# Altium PCB PCB1.PcbDoc (part 3 of 3)
Units mm, origin at the board's own origin, x right, y up, seen from the top; angles counter-clockwise.
Board outline 395.86 x 234.82 mm, 2 copper layers (Top Layer, Bottom Layer); 284 components, 215 nets, 949 pads, 803 vias.
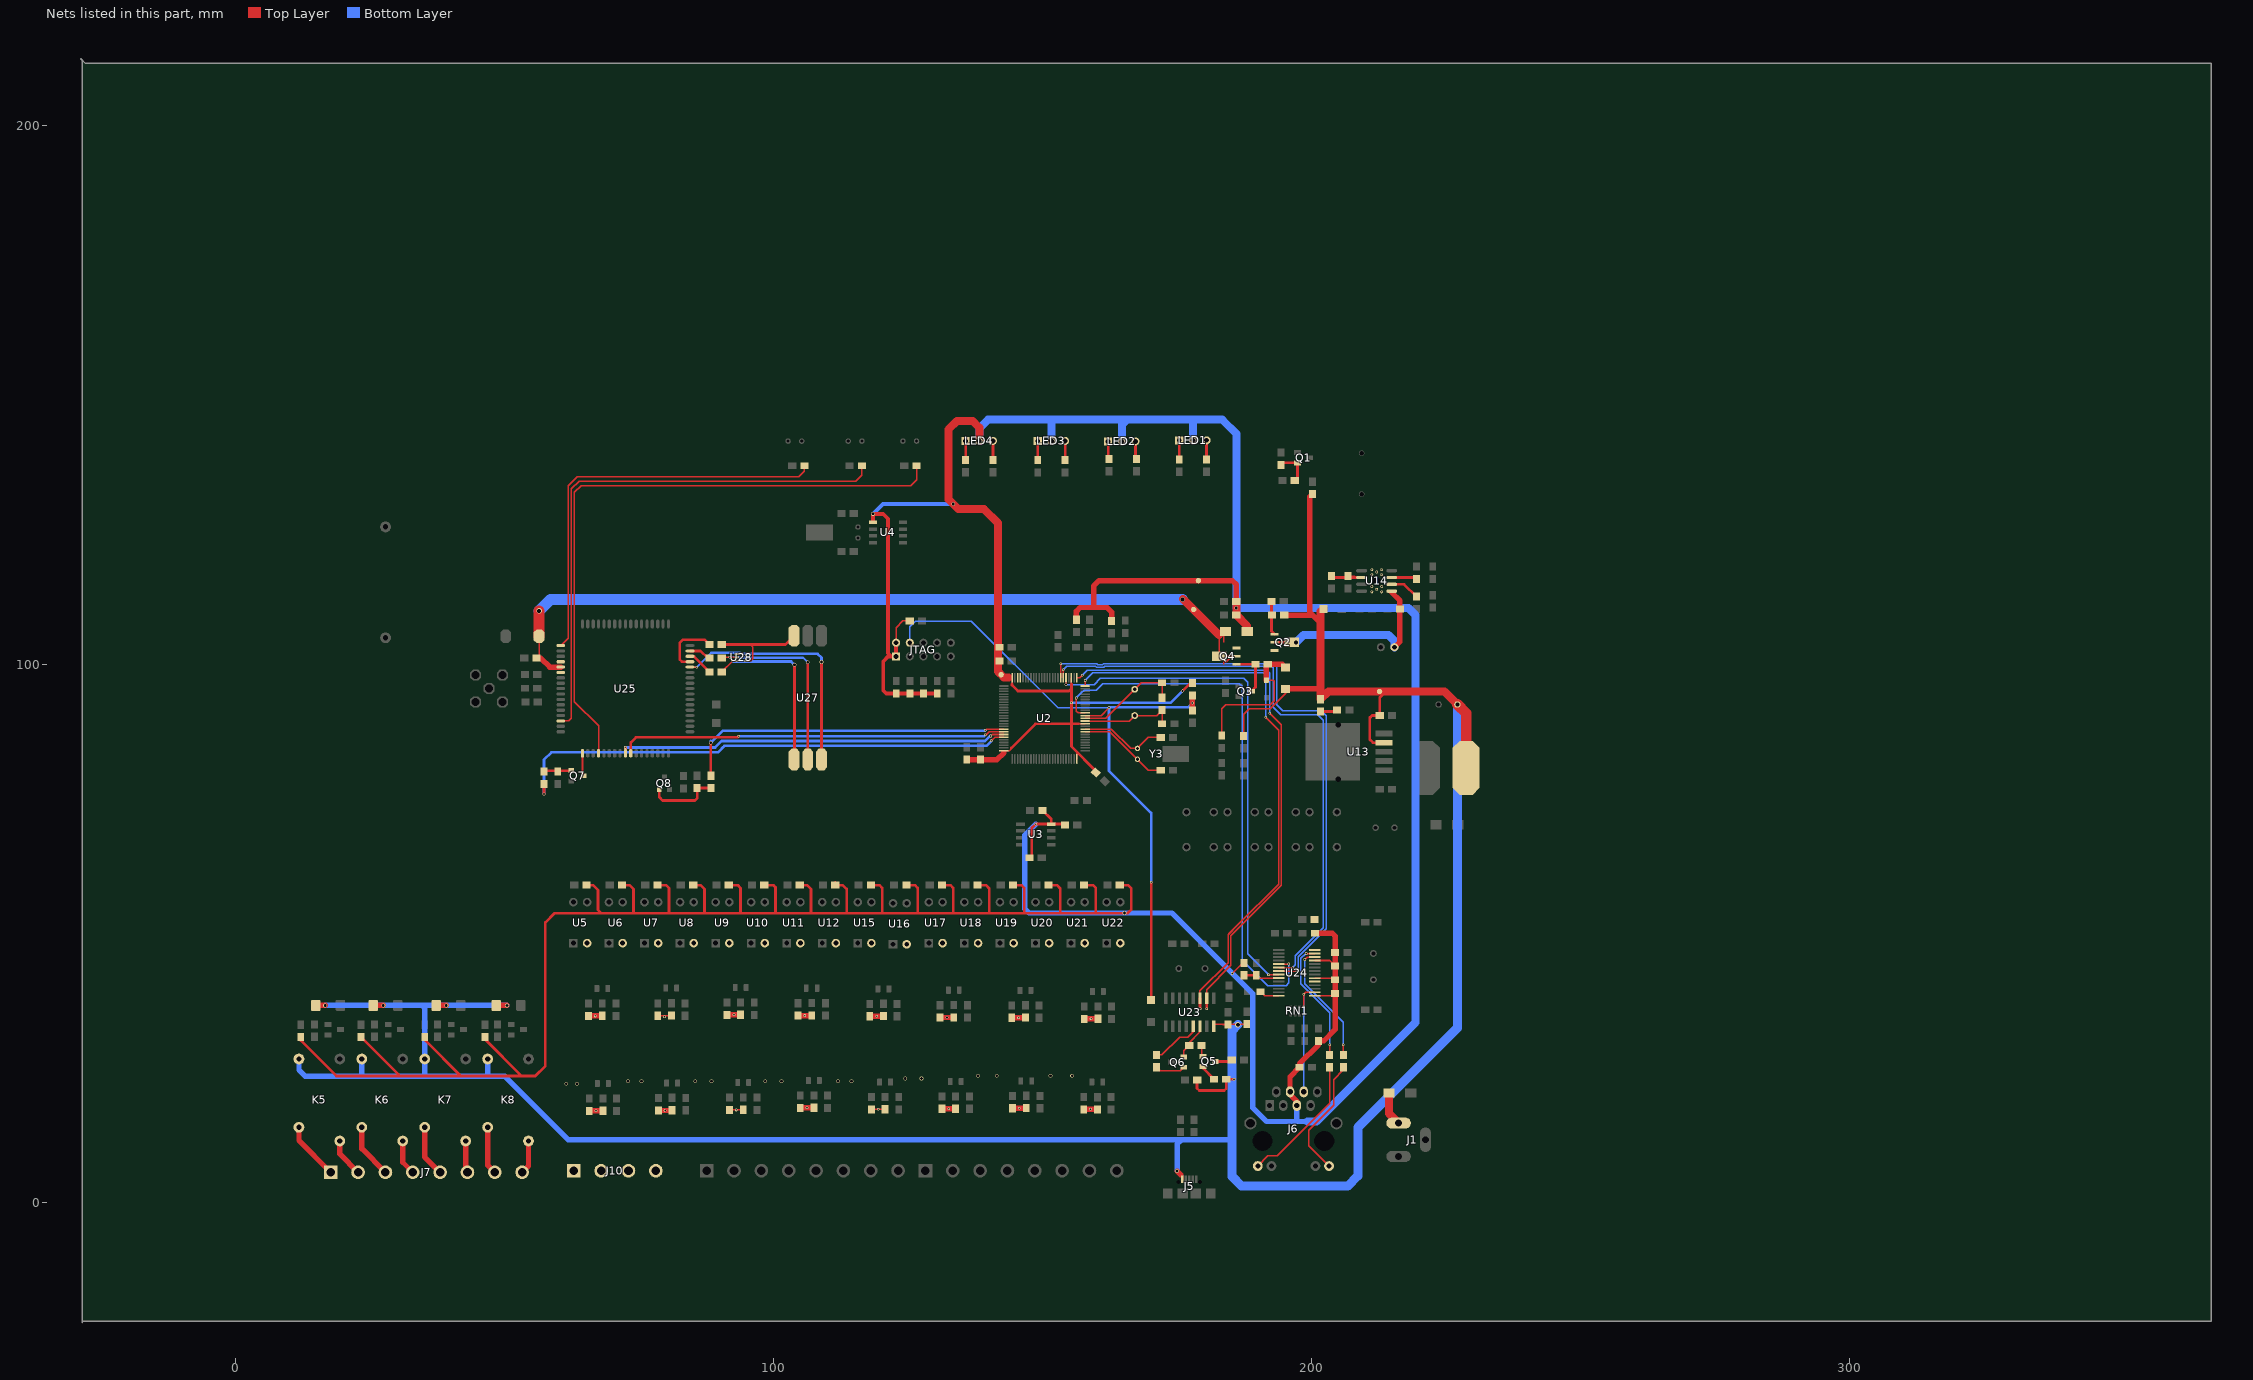
[diagram p3: the nets of this part, all layers, seen from the top]

## Via types
v1: diameter 0.5, hole 0.3, Top Layer to Bottom Layer, tented both sides, 771 vias
v2: diameter 0.7, hole 0.5, Top Layer to Bottom Layer, tented both sides, 29 vias
v3: diameter 1, hole 0.7, Top Layer to Bottom Layer, tented both sides, 3 vias

## Nets (pads, with @x,y where several pads share a name; then routed paths per layer and width w, separated by ;. In a path a pad name is that pad's centre, name@x,y a point inside that pad or via, vN(x,y) a via of type N, cw(c..) or ccw(c..) an arc to the next point about the centre after c; other vN are vias at no path point) (continued)
NetJ6_6: J6.6 RN1.8 U24.16 | length 40.9
  Top Layer w0.254: v1(198.526,38.638) v1@198.532,38.644 ; RN1.8@198.532,36.344 198.532,38.638 v1@198.532,38.644 ; U24.16@200.616,39.012 198.9,39.012 ; v1@198.532,38.644 198.9,39.012 ; v1@198.532,38.644 198.9,39.012
  Bottom Layer w0.254: J6.6@198.526,20.52 v1(198.526,38.638) ; 198.532,37.45 198.532,20.526 J6.6@199.1,21.094
NetJ6_9: J6.9 R106.1 | length 24.9
  Top Layer w0.254: J6.9@190.001,6.73 191.871,8.6 193.6,8.6 203.352,18.352 R106.1@203.352,25.092
NetJ6_12: J6.12 R107.1 | length 22.6
  Top Layer w0.254: J6.12@203.25,6.73 199.5,10.48 199.5,13.4 204.1,18 204.1,22.8 205.892,24.592 R107.1@205.892,25.092
NetJ7_1: J7.1 K5.1 | length 10.8
  Top Layer w1: K5.1@11.848,13.924 11.848,11.478 J7.1@17.756,5.57
NetJ7_2: J7.2 K5.2 | length 7.2
  Top Layer w1: K5.2@19.448,11.384 19.448,8.958 J7.2@22.836,5.57
NetJ7_3: J7.3 K6.1 | length 10.2
  Top Layer w1: K6.1@23.532,13.924 23.532,9.954 J7.3@27.916,5.57
NetJ7_4: J7.4 K6.2 | length 6.6
  Top Layer w1: K6.2@31.132,11.384 31.132,7.434 J7.4@32.996,5.57
NetJ7_5: J7.5 K7.1 | length 9.5
  Top Layer w1: K7.1@35.216,13.924 35.216,8.43 J7.5@38.076,5.57
NetJ7_6: J7.6 K7.2 | length 6
  Top Layer w1: K7.2@42.816,11.384 42.816,5.91 J7.6@43.156,5.57
NetJ7_7: J7.7 K8.1 | length 8.9
  Top Layer w1: K8.1@46.9,13.924 46.9,6.906 J7.7@48.236,5.57
NetJ7_8: J7.8 K8.2 | length 6.3
  Top Layer w1: J7.8@53.316,5.57 54.5,6.754 K8.2@54.5,11.384
NetLED1_1: LED1.1 R11.1 | length 3.6
  Top Layer w0.5: R11.1@175.4,138.012 LED1.1@175.4,141.568
NetLED1_3: LED1.3 R10.1 | length 3.6
  Top Layer w0.5: R10.1@180.48,138.012 LED1.3@180.48,141.568
NetLED2_1: LED2.1 R13.1 | length 3.3
  Top Layer w0.5: LED2.1@162.192,141.376 162.192,138.296 R13.1@162.38,138.108
NetLED2_3: LED2.3 R12.1 | length 3.3
  Top Layer w0.5: LED2.3@167.272,141.376 167.272,138.296 R12.1@167.46,138.108
NetLED3_1: LED3.1 R15.1 | length 3.6
  Top Layer w0.5: R15.1@149.116,137.892 LED3.1@149.116,141.448
NetLED3_3: LED3.3 R14.1 | length 3.6
  Top Layer w0.5: R14.1@154.196,137.892 LED3.3@154.196,141.448
NetLED4_1: LED4.1 R17.1 | length 3.6
  Top Layer w0.5: R17.1@135.716,137.912 LED4.1@135.716,141.468
NetLED4_3: LED4.3 R16.1 | length 3.6
  Top Layer w0.5: R16.1@140.796,137.912 LED4.3@140.796,141.468
NetLED5_1: LED5.1 R62.2 | length 3.2
  Top Layer w0.5: R62.2@201.676,91.186 204.47,91.186 LED5.1@204.724,91.44
NetQ1_2: Q1.2 R19.2 R21.2 | length 7
  Top Layer w0.254: Q1.2@197.368,137.371 Q1.2@197.622,137.117
  Top Layer w0.5: R21.2@194.32,136.99 194.701,137.371 Q1.2@197.368,137.371 197.368,134.63 R19.2@196.85,134.112
NetQ2_1: Q2.1 R71.1 R82.2 | length 8.9
  Top Layer w0.254: R82.2@192.546,111.638 192.546,110.382 192.616,110.312 R71.1@192.616,109.098
  Top Layer w0.5: R82.2@192.546,111.638 192.546,110.382 192.546,109.098 192.546,106.12 Q2.1@193.124,105.542
NetQ3_3: Q3.3 Q4.1 R84.1 | length 8.9
  Top Layer w0.5: Q4.1@186.012,99.954 R84.1@189.568,99.954 189.568,95.699 Q3.3@188.806,94.937
NetQ5_1: Q5.1 R86.2 | length 2.1
  Top Layer w0.254: R86.2@179.542,29.148 179.542,27.37 Q5.1@179.796,27.116
NetQ5_2: Q5.2 R120.1 | length 3.2
  Top Layer w0.5: Q5.2@179.796,25.211 179.796,24.928 R120.1@181.864,22.86
NetQ5_3: Q5.3 R85.2 | length 3.2
  Top Layer w0.5: Q5.3@182.082,26.163 184.913,26.163 R85.2@185.166,26.416
NetQ6_1: Q6.1 R95.1 | length 5.6
  Top Layer w0.254: R95.1@171.16,25.084 171.844,24.4 175.556,24.4 Q6.1@176.24,25.084
NetQ6_2: Q6.2 R86.1 U23.14 | length 7
  Top Layer w0.254: Q6.2@176.24,26.989 176.24,28.132 R86.1@177.256,29.148
  Top Layer w0.3: R86.1@177.256,29.148 177.256,29.656 179.257,31.657 U23.14@179.257,32.692
NetQ7_2: Q7.2 R91.2 R92.2 | length 6.6
  Top Layer w0.254: R91.2@57.388,79.741 R91.2@57.388,80.01 ; 61.275,80.198 Q7.2@62.436,80.198
  Top Layer w0.5: R91.2@57.388,80.01 57.576,80.198 Q7.2@62.436,80.198
NetQ8_2: Q8.2 R87.2 R93.2 | length 13.3
  Top Layer w0.5: Q8.2@78.79,76.676 78.79,75.286 79.426,74.651 85.446,74.651 85.836,75.041 R93.2@85.836,76.962 R87.2@88.376,76.962
NetR41_1: R41.1 U14.7 | length 4.7
  Top Layer w0.5: U14.7@214.884,116.078 219.202,116.078 R41.1@219.456,115.824
NetR42_2: R42.2 U14.6 | length 5.5
  Top Layer w0.5: U14.6@214.884,114.808 217.17,114.808 R42.2@219.456,112.522
NetR52_1: R52.1 R53.1 U14.2 | length 8.3
  Top Layer w0.254: R53.1@206.756,116.332 207.899,116.332 208.153,116.078 U14.2@209.296,116.078
  Top Layer w0.5: R52.1@203.708,116.332 203.962,116.078 206.756,116.078 208.153,116.078 U14.2@209.296,116.078
NetR88_2: R88.2 U25.66 | length 101.5
  Top Layer w0.254: U25.66@60.508,89.432 61.949,89.432 62.459,89.941 62.459,132.537 63.906,133.985 115.316,133.985 116.438,135.107 R88.2@116.438,136.852
NetR90_1: R90.1 U24.14 | length 3.7
  Top Layer w0.254: R90.1@190.5,39.116 191.254,38.362 U24.14@193.916,38.362
NetR94_1: R94.1 R97.1 U24.9 | length 6.7
  Top Layer w0.254: R94.1@189.7,42.164 190.2,41.664 U24.9@193.916,41.664
  Top Layer w0.5: R97.1@187.452,42.164 R94.1@189.7,42.164
NetR95_2: R95.2 U23.13 | length 9.6
  Top Layer w0.254: R95.2@171.16,27.37 172.161,27.37 175.491,30.7 177,30.7 177.987,31.687 U23.13@177.987,32.692
NetR96_2: R96.2 U25.4 | length 117.4
  Top Layer w0.254: U25.4@67.508,83.432 67.508,88.55 63.043,93.015 63.043,131.902 64.287,133.147 125.476,133.147 126.598,134.269 R96.2@126.598,136.852
NetR106_2: R106.2 U24.27 | length 23.1
  Top Layer w0.254: v1(199,46.214) U24.27@200.616,46.214 ; R106.2@203.352,27.378 v1(203.352,29.252)
  Bottom Layer w0.254: v1(199,46.214) 198.922,46.214 198,45.292 198,40.582 203.352,35.23 v1(203.352,29.252)
NetR107_2: R107.2 U24.26 | length 22.8
  Top Layer w0.254: v1(198.7,45.1) 199.164,45.564 U24.26@200.616,45.564 ; R107.2@205.892,27.378 v1(205.892,29.292)
  Bottom Layer w0.254: v1(198.7,45.1) 198.7,40.6 199.7,39.6 205.892,33.408 v1(205.892,29.292)
NetR115_2: R115.2 U25.52 | length 76.3
  Top Layer w0.254: U25.52@60.508,103.432 61.849,104.773 61.849,133.121 63.475,134.747 ; 63.475,134.798 104.724,134.798 105.77,135.844 R115.2@105.77,136.852
NetR116_1: R116.1 U27.4 U28.6 | length 36
  Top Layer w0.254: v1(92.382,100.584) U28.6@93.151,100.584
  Top Layer w0.3: R116.1@90.408,98.552 92.382,100.526 v1(92.382,100.584)
  Top Layer w0.5: 103.846,85.154 U27.4@103.846,82.264 103.911,82.329 v2(103.911,99.873)
  Bottom Layer w0.254: v1(92.382,100.584) v1@92.44,100.526
  Bottom Layer w0.4: v1@92.382,100.526 v1@92.44,100.526
  Bottom Layer w0.5: v1@92.44,100.526 92.49,100.476 103.308,100.476 v2(103.911,99.873)
NetR117_1: R117.1 U27.5 U28.5 | length 39.1
  Top Layer w0.3: R117.1@90.408,101.092 90.55,101.234 v1(91.866,101.234) 91.87,101.238 93.147,101.238 U28.5@93.151,101.234
  Top Layer w0.4: 106.386,85.573 U27.5@106.386,82.264 v2(106.386,100.314)
  Bottom Layer w0.4: v1(91.866,101.234) 91.92,101.288 93.584,101.288 93.692,101.18 105.52,101.18 v2(106.386,100.314) ; v1@91.9,101.2 v1@91.92,101.18
NetR118_1: R118.1 U27.1 U28.1 | length 18.3
  Top Layer w0.254: U28.1@94.98,100.584 95.809,100.584 96.2,100.975 96.2,103.124 ; 95.768,103.632 96.2,103.2
  Top Layer w0.5: R118.1@90.408,103.632 95.768,103.632 102.214,103.632 U27.1@103.846,105.264
OSC32_IN: C11.2 U2.8 Y3.2 | length 17
  Top Layer w0.254: U2.8@157.918,87.416 162.52,87.416 Y3.2@167.64,82.296 169.672,80.264 C11.2@171.958,80.264
OSC32_OUT: C12.2 U2.9 Y3.1 | length 16.4
  Top Layer w0.254: U2.9@157.918,87.916 162.784,87.916 166.372,84.328 Y3.1@167.64,84.328 169.672,86.36 C12.2@171.958,86.36
OSC_IN: C1.1 R1.1 U2.12 Y1.1 | length 17.7
  Top Layer w0.254: U2.12@157.918,89.416 166.124,89.416 Y1.1@167.132,90.424 171.196,90.424 R1.1@172.212,91.44 C1.1@172.212,88.9
OSC_OUT: C2.1 R1.2 U2.13 Y1.2 | length 19.8
  Top Layer w0.254: U2.13@157.918,89.916 161.744,89.916 Y1.2@167.132,95.304 168.348,96.52 C2.1@172.212,96.52 R1.2@172.212,93.726
PGND: C44.2 C45.2 C46.2 C47.2 C48.2 C49.2 C50.2 C51.2 C52.2 C53.2 C54.2 C55.2 C56.2 C57.2 C58.2 C59.2 J10.1 J10.2 J10.3 J10.4 R33.1 R34.1 R35.1 R36.1 R37.1 R38.1 R39.1 R40.1 R63.1 R64.1 R65.1 R66.1 R67.1 R68.1 R69.1 R70.1 U5.2 U6.2 U7.2 U8.2 U9.2 U10.2 U11.2 U12.2 U15.2 U16.2 U17.2 U18.2 U19.2 U20.2 U21.2 U22.2 | length 40.8
  Top Layer w0.254: R64.1@78.524,34.668 81.052,34.668 C53.2@81.064,34.68 ; R35.1@91.844,17.16 94.372,17.16 C46.2@94.384,17.172 ; R37.1@118.204,17.26 120.732,17.26 C48.2@120.744,17.272
  Top Layer w1: R63.1@65.676,34.62 68.188,34.62 C52.2@68.216,34.648 ; R33.1@65.78,16.984 68.308,16.984 C44.2@68.32,16.996 ; R34.1@78.632,17.06 81.118,17.06 C45.2@81.172,17.114 ; R65.1@91.376,34.82 93.888,34.82 C54.2@93.916,34.848 ; R66.1@104.576,34.688 107.088,34.688 C55.2@107.116,34.716 ; R36.1@104.984,17.536 107.512,17.536 C47.2@107.524,17.548 ; R67.1@117.9,34.568 120.412,34.568 C56.2@120.44,34.596 ; R68.1@130.984,34.32 133.48,34.32 C57.2@133.508,34.348 ; R38.1@131.324,17.36 133.852,17.36 C49.2@133.864,17.372 ; R69.1@144.296,34.276 146.808,34.276 C58.2@146.836,34.304 ; R39.1@144.432,17.468 146.918,17.468 C50.2@146.972,17.522 ; R40.1@157.648,17.26 160.142,17.26 C51.2@160.188,17.214 ; R70.1@157.752,34.076 160.264,34.076 C59.2@160.292,34.104
  other v1: 67.05,16.984 79.875,17.06 93.1,17.16 119.5,17.26 158.925,17.26 132.575,17.36 145.7,17.468 106.25,17.536 159.025,34.076 145.55,34.276 132.25,34.32 79.775,34.475 119.2,34.568 66.925,34.62 105.825,34.688 92.675,34.82
  other v2: 61.5,22 63.5,22 73,22.5 75.5,22.5 85.5,22.5 88.5,22.5 98.5,22.5 101.5,22.5 112,22.5 114.5,22.5 124.5,23 127.5,23 138,23.5 141.5,23.5 151.5,23.5 155.5,23.5
PWRKEY: Q7.3 U25.1 | length 4.3
  Top Layer w0.4: U25.1@64.508,83.432 64.508,79.526 Q7.3@64.786,79.248
RESET: C7.2 D24.1 JTAG.4 R18.1 U2.14 | length 128.6
  Top Layer w0.254: C7.2@177.846,91.377 C7.2@177.848,91.377 ; R18.1@177.846,94.171 R18.1@177.848,94.171
  Top Layer w0.3: U2.14@157.918,90.416 160.901,90.416 v1(162.357,91.872)
  Top Layer w0.5: D24.1@170.18,37.643 v1(170.18,59.436)
  Top Layer w1: C7.2@177.846,91.377 177.848,91.379 R18.1@177.848,94.171
  Bottom Layer w0.3: JTAG.4@125.34,103.96 125.34,106.925 126.39,107.975 136.779,107.975 152.883,91.872 v1(162.357,91.872)
  Bottom Layer w0.5: 170.18,59.741 v1(170.18,59.436) 170.18,72.339 162.357,80.162 v1(162.357,91.872) 162.485,92 177.09,92 v1(177.851,92.761)
SIM900_RST: R87.1 U2.67 | length 62
  Top Layer w0.3: v1(139.37,87.706) 139.58,87.916 U2.67@142.818,87.916
  Top Layer w0.5: R87.1@88.376,79.248 v2(88.376,85.395)
  Bottom Layer w0.5: 88.376,85.76 v2(88.376,85.395) 90.578,87.597 139.26,87.597 v1(139.37,87.706)
SIM900_RXD: U2.68 U25.10 | length 71.6
  Top Layer w0.3: v1@139.522,86.843 140.096,87.416 U2.68@142.818,87.416
  Top Layer w0.5: U25.10@73.508,83.432 73.508,85.421 74.473,86.385 93.345,86.385 v1(93.548,86.589)
  Bottom Layer w0.5: v1(93.548,86.589) 139.116,86.589
  other v1: 139.37,86.843
SIM900_TXD: U2.69 U25.9 | length 72.4
  Top Layer w0.3: v1(140.36,86.639) 140.637,86.916 U2.69@142.818,86.916
  Top Layer w0.5: v1(72.492,84.506) 72.508,84.489 U25.9@72.508,83.432
  Bottom Layer w0.5: v1(72.492,84.506) 89.179,84.506 90.373,85.7 139.293,85.7 140.233,86.639 v1(140.36,86.639)
SIM_CLK: R116.2 U25.32 | length 4.8
  Top Layer w0.5: U25.32@84.508,101.432 85.242,101.432 R116.2@88.122,98.552
SIM_DATA: R118.2 U25.31 | length 11.3
  Top Layer w0.254: R118.2@88.122,103.632 R118.2@88.138,103.632
  Top Layer w0.5: U25.31@84.508,100.432 83.007,100.432 82.575,100.863 82.575,103.911 83.185,104.521 87.233,104.521 R118.2@88.122,103.632
SIM_PWRKEY: R91.1 U2.70 | length 95.4
  Top Layer w0.3: v1(140.487,85.725) 141.178,86.416 U2.70@142.818,86.416
  Top Layer w0.5: v1(57.388,75.854) R91.1@57.388,77.724
  Bottom Layer w0.5: v1(57.388,75.854) 57.388,82.229 58.75,83.591 89.687,83.591 90.424,84.328 90.602,84.506 90.907,84.811 139.573,84.811 v1(140.487,85.725)
SIM_RST: R117.2 U25.33 | length 4.2
  Top Layer w0.5: U25.33@84.508,102.432 86.468,102.432 87.808,101.092 R117.2@88.122,101.092
SIM_VDD: U25.30 U27.6 U28.4 | length 49.3
  Top Layer w0.254: U25.30@84.508,99.432 v1(85.768,99.432)
  Top Layer w0.4: U28.4@93.151,101.884 v1(93.984,101.884)
  Top Layer w0.5: 108.926,85.914 U27.6@108.926,82.264 v2(108.926,100.381)
  Bottom Layer w0.4: v1(85.768,99.432) 88.444,102.108 93.76,102.108 v1(93.984,101.884)
  Bottom Layer w0.5: v1(93.984,101.884) 108.216,101.884 108.926,101.174 v2(108.926,100.381)
SPI2_MISO: U2.31 U24.6 | length 109.6
  Top Layer w0.254: U2.31@153.868,97.466 v1(153.868,98.943) ; U24.6@193.916,43.614 v1@196.5,43.614
  Bottom Layer w0.254: v1(153.868,98.943) 153.883,98.943 154.5,99.56 159.861,99.56 160.018,99.403 161.382,99.403 161.539,99.56 192.69,99.56 192.9,99.35 192.9,91.929 194.254,90.575 201.175,90.575 202.192,89.558 202.192,51.017 196.984,45.809 196.984,44.084 v1(196.5,43.6)
SPI2_MOSI: U2.32 U24.7 | length 113.3
  Top Layer w0.254: U2.32@153.368,97.466 v1(153.368,100.068) ; U24.7@193.916,42.964 v1@197.3,42.964
  Bottom Layer w0.254: v1(153.368,100.068) 160.071,100.068 160.228,99.911 161.172,99.911 161.329,100.068 193.007,100.068 193.5,99.575 193.5,92.4 194.6,91.3 201.8,91.3 202.7,90.4 202.7,50.806 197.492,45.598 197.492,43.192 v1(197.3,43)
SPI2_SCK: U2.30 U24.8 | length 93.6
  Top Layer w0.254: v1@154.368,96.19 U2.30@154.368,97.466 ; v1(192,42.3) 192.014,42.314 U24.8@193.916,42.314
  Bottom Layer w0.254: v1(154.356,96.19) 159.578,96.19 160.731,97.343 187.366,97.343 188.087,96.622 188.087,46.213 v1(192,42.3)
SR: pad.0@211.2,117.5 pad.1 pad.2 pad.3 pad.4 pad.5 pad.6 pad.7 pad.8 pad.9 U14.9
USART2_RX: U2.26 U23.2 | length 106.8
  Top Layer w0.254: U2.26@156.368,97.466 156.927,97.466 v1(157.404,97.942) ; 180.527,36.772 U23.2@180.527,37.892 180.527,39.527 185,44 185,49.524 194.386,58.91 194.386,88.697 v1(192.227,90.856)
  Top Layer w0.5: v1(180.527,35.976) U23.2@180.527,37.892
  Bottom Layer w0.254: v1(157.404,97.942) 158.328,98.867 191.684,98.867 192.227,98.323 v1(192.227,90.856)
USART2_TX: U2.25 U23.3 | length 107.4
  Top Layer w0.254: U2.25@157.963,95.992 v1(157.963,96.952) ; U23.3@179.257,37.084 U23.3@179.257,37.892 179.257,39.257 184.492,44.492 184.492,49.734 186.204,51.446 ; 184.621,49.863 186.204,51.446 ; v1(191.491,90.094) 193.878,87.706 193.878,59.12 186.204,51.446
  Top Layer w0.5: v1(179.257,35.932) U23.3@179.257,37.892
  Bottom Layer w0.254: v1(157.963,96.952) 159.37,98.359 191.15,98.359 191.491,98.019 v1(191.491,90.094)
USART3_RX: U2.48
USART3_TX: U2.47
V1: C37.1 C38.1 D23.1 pad.@178.079,110.134 Q4.2 Q4.4 U25.55 U25.56 U25.57 | length 156.9
  Top Layer w0.254: C38.1@56.062,101.03 C38.1@56,101.092 56.472,101.44 C37.1@56.472,105.156 ; 182.8,104.2 182.812,104.2 ; Q4.4@182.812,101.454 182.812,104.2 ; 183.647,104.047 D23.1@183.647,105.717 ; 183.65,99.95 183.65,100.421 184.133,100.421 185.166,101.454 ; Q4.4@184.1,101 184.1,101.454 185.166,101.454 ; Q4.2@186.012,101.454 185.166,101.454 ; 182.812,104.2 182.812,104.882 D23.1@183.647,105.717 ; D23.1@183.647,105.717 183.647,106.05 D23.1@183.98,106.05 D23.1@183.647,105.717
  Top Layer w0.5: Q4.4@182.812,101.454 Q4.4@184.1,101.454
  Top Layer w1: 56.82,101.067 58.454,99.432 U25.56@60.508,99.432
  Top Layer w1.5: v3@176.1,112.1 182.812,105.388
  Top Layer w2: C37.1@56.472,105.156 v3(56.472,109.872)
  Bottom Layer w2: v3(56.472,109.872) 58.6,112 v3(176,112)
VBAT: C16.1 J4.1 pad.0@197.1,104 Q2.2 Q2.4 U14.5 | length 35.6
  Top Layer w0.254: Q2.2@193.124,104.042 194.487,104.042 ; 214.884,112.928 214.884,113.3 U14.5@214.884,113.538
  Top Layer w0.5: Q2.2@193.124,104.042 194.487,104.042 Q2.4@195.05,104.042
  Top Layer w1: U14.5@214.884,113.3 216.408,111.776 C16.1@216.408,110.236 216.408,104.14 J4.1@215.392,103.124
  Bottom Layer w1.5: pad.0@197.1,104 198.5,105.4 214.3,105.4 215.392,104.308 J4.1@215.392,103.124
VBT: D21.2 D22.2 Q2.3 Q4.3 R72.2 R84.2 | length 27.2
  Top Layer w0.254: R72.2@183.303,86.71 183.303,91.703 184,92.4 192.3,92.4 193.1,93.2 193.1,96.8 192.892,97.008 D22.2@191.6,97.008
  Top Layer w1: D22.2@191.6,97.008 191.6,99.7 R84.2@191.854,99.954 194.534,99.954 D21.2@195.156,99.332
VCC+3.3V: C9.1 C10.1 C19.1 C22.1 C23.2 C24.1 C25.1 C26.1 C27.1 C28.1 C43.1 C69.2 C70.2 C71.2 C72.2 C73.2 D23.2 J6.4 J6.5 JTAG.1 JTAG.2 L2.1 L3.2 L6.2 LED1.2 LED2.2 LED3.2 LED4.2 pad.@142.309,98.026 pad.@178.968,115.5 R3.1 R4.1 R5.1 R18.2 R22.1 R23.2 R24.2 R43.2 R44.2 R45.2 R46.2 R47.2 R48.2 R49.2 R50.2 R74.2 R75.2 R76.2 R77.2 R78.2 R79.2 R80.2 R81.2 R97.2 R99.1 R101.1 R102.1 R104.1 U2.11 U2.28 U2.50 U2.75 U2.100 U3.8 U4.1 U24.15 U24.19 U24.20 U24.25 U24.28 | length 1003.7
  Top Layer w0.254: R50.2@111.506,58.928 111.506,59.639 ; JTAG.2@122.8,103.96 122.8,106.782 124.042,108.024 R22.1@125.34,108.024 ; U2.75@142.818,83.916 143.854,83.916 ; 144.337,96.3 U2.50@144.337,97.435 ; U2.50@144.337,97.466 U2.50@144.337,97.435 ; U2.50@144.368,97.466 U2.50@144.337,97.435 ; C9.1@149.988,72.81 C9.1@149.988,73.33 ; 155.368,96.291 U2.28@155.368,97.466 ; 156.743,88.916 U2.11@157.918,88.916 ; 186.012,108.229 C27.1@186.012,109.098 ; U24.15@200.616,38.362 203.922,38.362 C26.1@204.368,38.808 ; C19.1@204.034,41.014 C19.1@204.368,41.348 ; C24.1@204.358,46.428 C24.1@204.368,46.428
  Top Layer w0.3: 143.854,83.916 144.307,84.369 ; U2.100@156.368,82.366 156.368,83.541 ; v1(185.25,42.5) 187.2,44.45 R97.2@187.452,44.45 ; U24.20@200.616,41.612 204.104,41.612 C19.1@204.368,41.348 ; U24.25@200.616,44.914 203.342,44.914 C22.1@204.368,43.888
  Top Layer w0.5: R99.1@12.192,30.7 12.192,30.048 18.796,23.444 41.91,23.444 ; R101.1@23.352,30.692 30.429,23.615 ; R102.1@35.228,30.684 35.228,30.126 41.91,23.444 ; R104.1@46.392,30.688 46.392,30.291 53.238,23.444 ; R43.2@65.278,58.928 66.472,58.928 67.4,58 67.4,54.3 68,53.7 ; R44.2@71.882,58.928 73.272,58.928 74,58.2 74,53.8 ; R45.2@78.486,58.928 80.072,58.928 80.6,58.4 80.6,53.8 ; R46.2@85.09,58.928 86.472,58.928 87.2,58.2 87.2,53.7 ; R47.2@91.694,58.928 93.372,58.928 93.9,58.4 93.9,53.7 ; R48.2@98.298,58.928 99.972,58.928 100.4,58.5 100.4,53.7 ; R49.2@104.902,58.928 106.272,58.928 107,58.2 107,53.8 ; R50.2@111.506,58.928 112.872,58.928 113.6,58.2 113.6,53.7 ; R74.2@118.11,58.928 119.672,58.928 120.2,58.4 120.2,53.7 ; R75.2@124.714,58.928 126.272,58.928 126.8,58.4 126.8,53.7 ; R76.2@131.318,58.928 132.872,58.928 133.4,58.4 133.4,53.7 ; R77.2@137.922,58.928 139.472,58.928 140.1,58.3 140.1,53.7 ; 144.245,84.431 148.714,88.9 ; 144.337,96.3 144.337,96.074 145.411,95 154.915,95 155.368,95.453 ; R78.2@144.526,58.928 146.072,58.928 146.6,58.4 146.6,53.7 ; R24.2@147.574,64.008 148,64.434 148,69.5 v1(148.75,70.25) 148.77,70.27 U3.8@151.624,70.27 ; 148.838,88.9 155.368,88.9 ; C9.1@149.988,72.81 151.624,71.174 U3.8@151.624,70.27 ; R79.2@151.13,58.928 152.672,58.928 153.3,58.3 153.3,53.7 ; R23.2@154.178,70.104 154.012,70.27 U3.8@151.624,70.27 ; 155.368,96.291 v1(155.368,92.8) 155.368,88.9 ; 156.727,88.9 155.368,88.9 ; R80.2@157.734,58.928 159.372,58.928 159.9,58.4 159.9,53.7 ; C69.2@160.067,79.988 155.368,84.687 155.368,88.9 ; R81.2@164.338,58.928 165.872,58.928 166.5,58.3 166.5,54.4 165.8,53.7 159.9,53.7 ; v1(176,95) 177.457,96.457 R18.2@177.848,96.457 ; 41.91,23.444 53.238,23.444 ; 53.238,23.444 55.753,23.444 57.633,25.324 57.633,51.998 59.334,53.7 68,53.7 ; 68,53.7 87.2,53.7 ; 87.2,53.7 93.9,53.7 ; 93.9,53.7 100.4,53.7 ; 100.4,53.7 113.6,53.7 ; 113.6,53.7 120.2,53.7 ; 120.2,53.7 126.8,53.7 ; 126.8,53.7 133.4,53.7 ; 133.4,53.7 140.1,53.7 ; 140.1,53.7 146.6,53.7 ; 146.6,53.7 153.3,53.7 ; 153.3,53.7 159.9,53.7
  Top Layer w0.7: U4.1@118.498,126.345 v2(118.498,127.898) 120.402,127.898 121.3,127 121.3,102.02 121.9,101.42 ; JTAG.2@122.8,103.96 JTAG.1@122.8,101.42 121.9,101.42 ; R5.1@130.44,94.548 R4.1@127.9,94.548 R3.1@125.36,94.548 C10.1@122.82,94.548 120.952,94.548 120.4,95.1 120.4,100.5 121.32,101.42 121.9,101.42
  Top Layer w1: C73.2@135.915,82.245 C70.2@138.455,82.245 141.551,82.245 142.818,83.512 ; L2.1@156.296,108.228 156.296,109.796 157,110.5 159.5,110.5 ; L3.2@162.844,107.99 162.844,109.656 162,110.5 159.5,110.5 ; C28.1@186.012,111.638 186.012,114.738 185.25,115.5 160.5,115.5 159.5,114.5 159.5,110.5 ; J6.5@197.256,17.98 197.256,18.744 195.986,20.014 J6.4@195.986,20.52 195.986,23.314 C43.1@197.764,25.092 197.764,25.764 201.26,29.26 L6.2@201.26,29.99 202.253,29.99 204.368,32.105 C26.1@204.368,38.808 C19.1@204.368,41.348 C22.1@204.368,43.888 C24.1@204.368,46.428 204.368,49.48 203.864,49.984 C25.1@200.6,49.984
  Top Layer w1.5: LED4.2@138.256,141.468 138.256,143.913 137.033,145.136 134.087,145.136 132.563,143.612 132.563,130.607 v2(133.417,129.752) 134.341,128.829 139.09,128.829 141.732,126.187 141.732,103.124 141.732,98.603 142.799,97.536 143.714,97.536 ; C28.1@186.012,111.638 v2(186.012,110.4) C27.1@186.012,109.098 188.03,107.08 D23.2@188.03,106.05
  Bottom Layer w0.5: v1(155.368,92.8) 173.8,92.8 v1(176,95)
  Bottom Layer w0.7: v2(118.498,127.898) 120.352,129.752 v2(133.417,129.752)
  Bottom Layer w1: v1(148.75,70.25) 146.696,68.196 146.696,54.554 147.5,53.75 v2(165.25,53.75) 174.063,53.75 189.052,38.76 189.052,17.577 191.629,15 197.358,15 ; J6.5@197.256,17.98 197.256,15.102 197.358,15 ; 199.212,15 197.358,15
  Bottom Layer w1.5: LED4.2@138.256,141.468 138.256,143.756 139.9,145.4 165.7,145.4 ; LED3.2@151.656,141.448 151.656,144.656 ; LED2.2@164.732,141.376 164.732,144.432 165.7,145.4 ; LED1.2@177.94,141.568 177.94,145.14 ; 199.212,15 200.9,15 219.3,33.4 219.3,109.097 217.997,110.4 v2(186.012,110.4) 186.012,142.788 183.4,145.4 165.7,145.4
VCC+5V: C17.1 C18.2 C30.2 C31.2 D21.1 D28.2 D29.2 D30.2 D31.2 J5.1 K5.4 K6.4 K7.4 K8.4 L5.2 pad.@212.623,94.9 R7.2 R20.1 R51.1 R62.1 R71.2 R89.2 R120.2 U13.4 U23.16 | length 537.9
  Top Layer w0.254: U23.16@181.797,32.692 181.797,33.045 183.501,33.045 ; C30.2@184.464,33.006 183.54,33.006 183.501,33.045 ; R7.2@187.363,86.65 187.363,90.655 188.4,91.692 192.31,91.692 195.156,94.538 D21.1@195.156,95.382 ; C31.2@187.752,32.898 187.604,33.045 183.501,33.045
  Top Layer w0.5: J5.1@175.952,4.299 J5.1@175.952,4.948 ; R89.2@178.714,22.682 178.714,21.184 178.742,21.156 ; R89.2@178.742,22.692 178.742,21.156 ; v1(185.572,22.86) R120.2@184.15,22.86 184.15,21.158 183.744,20.752 179.146,20.752 178.742,21.156 ; U13.4@213.428,85.388 211.412,85.388 210.8,86 210.8,90.021 211.227,90.448 C18.2@212.666,90.448 212.666,93.766 213.8,94.9
  Top Layer w1: D28.2@14.986,36.576 v2(16.713,36.576) ; D29.2@25.654,36.576 v2(27.534,36.576) ; D30.2@37.338,36.576 v2(39.243,36.576) ; D31.2@48.514,36.576 v2(50.495,36.576) ; v2(175,5.8) 175.7,5.1 ; R71.2@194.902,109.098 200.178,109.098 ; D21.1@195.156,95.382 201.458,95.382 ; R20.1@200.152,131.572 199.644,131.064 199.644,109.632 200.178,109.098 ; 201.676,107.6 200.178,109.098
  Top Layer w1.5: R51.1@202.184,110.236 201.676,109.728 201.676,107.6 R62.1@201.676,93.472 203.104,94.9 213.8,94.9 224.668,94.9 C17.1@227.088,92.48
  Top Layer w2: C17.1@227.088,92.48 228.708,90.86 L5.2@228.708,80.7
  Bottom Layer w1: K5.4@11.848,26.624 11.848,24.576 12.979,23.444 46.9,23.444 50.08,23.444 61.916,11.608 175.793,11.608 ; v2(16.713,36.576) v2(27.534,36.576) v2(39.243,36.576) v2(50.495,36.576) ; 23.532,23.56 K6.4@23.532,26.624 ; 35.154,36.17 35.216,36.107 K7.4@35.216,26.624 35.216,23.509 ; 46.9,23.634 K8.4@46.9,26.624 ; v2(175,5.8) 175,10.814 175.793,11.608 ; 185.2,11.659 185.149,11.608 175.793,11.608
  Bottom Layer w1.7: v3(186.3,33) 185.2,31.9 185.2,11.659 185.2,4.8 187,3 206.7,3 208.6,4.9 208.6,13.9 227.088,32.388 C17.1@227.088,92.48
VCC+12V: D9.1 J1.1 | length 6.3
  Top Layer w1.5: D9.1@214.376,20.32 214.376,16.487 J1.1@216.154,14.709
WOL: U2.15 U24.5 | length 103.4
  Top Layer w0.254: v1(156.286,93.701) 156.286,91.237 156.607,90.916 U2.15@157.918,90.916 ; U24.5@193.916,44.264 v1(195.764,44.264)
  Bottom Layer w0.254: v1(156.286,93.701) 156.667,94.082 156.667,94.104 157.197,94.633 157.197,94.636 157.734,95.174 160.01,95.174 161.163,96.327 186.578,96.327 187.071,95.834 187.071,45.009 191.821,40.259 195.259,40.259 195.764,40.764 v1(195.764,44.264)
pads on no net: J5.0@175.252,3.774 J5.0@176.052,1.624 J5.0@178.452,1.624 J5.0@179.252,3.774 J5.4 J6. J6.7 JTAG.8 U2.5 U2.6 U2.7 U2.18 U2.33 U2.34 U2.35 U2.36 U2.51 U2.52 U2.53 U2.54 U2.55 U2.56 U2.60 U2.61 U2.62 U2.71 U2.73 U23.9 U23.10 U23.11 U23.12 U23.15 U24.3 U25.2 U25.3 U25.5 U25.6 U25.7 U25.8 U25.11 U25.12 U25.13 U25.14 U25.15 U25.17 U25.19 U25.20 U25.21 U25.22 U25.23 U25.24 U25.25 U25.27 U25.28 U25.34 U25.35 U25.36 U25.37 U25.38 U25.40 U25.41 U25.42 U25.43 U25.44 U25.47 U25.48 U25.49 U25.50 U25.51 U25.67 U25.68 U27.2 U28.3

## Polygon pours and split planes (outlines as drawn)
GND on Bottom Layer "Top Layer-No Net" (solid, remove dead copper, pour order 1000): 10.231,154.175 1.231,145.175 1.231,9.175 9.231,1.175 223.231,1.175 226.231,1.175 234.231,9.175 234.231,16.175 234.231,146.175 226.231,154.175
SR on Bottom Layer "Top Layer-No Net" (solid, pour order 1000): 208.5,118.5 208,118 208,113.5 208.5,113 215.5,113 216,113.5 216,118 215.5,118.5
PGND on Bottom Layer "Top Layer-No Net" (solid, pour order 1001): 59.899,39.082 59.899,50.082 60.899,51.082 69.899,51.082 166.899,51.082 167.899,50.082 167.899,24.082 167.899,2.082 166.899,1.082 157.899,1.082 60.899,1.082 59.899,2.082
GND on Top Layer "Top Layer-No Net" (solid, remove dead copper, pour order 1002): 9,1 1,9 1,145 10,154 37,154 226,154 234,146 234,133 234,9 226,1
PGND on Top Layer "Top Layer-No Net" (solid, pour order 1001): 61,1 60,2 60,18.5 60,50 61,51 66,51 167,51 168,50 168,15 168,2.5 166.5,1

## Other copper
Top Layer:
  rectangle net GND: 178.552,4.846 179.539,5.766
  rectangle net V1: 180.5,99.1 184,107
  rectangle net VBAT: 195,101 199.25,107.25
  rectangle net VBT: 190.5,103.25 191.5,103.75
  region net VBT: 192.275,102.025 192.75,102.5 191.5,103.75 191.025,103.275
  region net VBT: 192.75,101 193.375,101.625 191.25,103.75 190.625,103.125
  rectangle net VBT: 185.25,102.75 191.25,103.75
  region net VCC+3.3V: 160.5,110.5 160.75,110.75 160,111.5 159.75,111.25
  region net VCC+3.3V: 158.75,110.5 159.625,111.375 159.25,111.75 158.375,110.875
  rectangle net VCC+3.3V: 200.3,40.9 204.368,41.7
  rectangle net GND: 198.4,42.2 201.6,43.1
  region net VCC+5V: 212.6,93.2 214,94.6 213,95.6 211.6,94.2
  region net NetD12_2: 218.3,81.3 219.9,82.9 219,83.8 217.4,82.2
  region net NetD12_2: 219.75,79.45 220.5,80.2 218.75,81.95 218,81.2
  region net VCC+5V: 200.8,95 201.85,96.05 201.1,96.8 200.05,95.75
  region net VCC+5V: 201.3,93.8 202.1,94.6 200.9,95.8 200.1,95
  region net VCC+5V: 202.9,94.3 203.7,95.1 202.2,96.6 201.4,95.8
  region net VCC+3.3V: 155.2,94 155.6,94.4 154.9,95.1 154.5,94.7
  region net VCC+3.3V: 155.368,87.9 156.418,88.95 155.368,90 154.318,88.95
  rectangle net VCC+5V: 181.5,32.3 188.6,33.8
  rectangle net VCC+3.3V: 141.986,83.287 143.256,84.023
  rectangle net VCC+3.3V: 143.612,96.799 144.374,98.273
  rectangle net V1: 59.919,98.146 61.112,100.66
  rectangle net VBT: 192.4,99.954 193.9,102.8
  rectangle net GND: 200.101,42.266 201.244,43.028
  rectangle net VCC+3.3V: 199.873,41.046 201.422,41.631
  rectangle net V1: 56.062,101.03 57.5,105.9
  rectangle net GND: 181.5,37.2 185.3,38.7
  rectangle net NetC13_1: 211.8,76.4 213.3,80.8
  rectangle net NetC15_1: 204.9,109.5 209.5,111
  rectangle net NetC15_1: 208.3,109.5 209.5,113.7
  rectangle net SR: 210.8,112.9 213.5,118
  rectangle net V1: 181.4,99.1 184.2,105.6
  region net V1: 182.8,104.2 184.2,105.6 182.8,107 181.4,105.6
  region net V1: 183.647,104.047 184.8,105.2 183.965,106.035 182.812,104.882
  region net V1: 184.466,100.754 185.166,101.454 184.066,102.554 183.366,101.854
  region net V1: 183.65,99.95 184.9,101.2 184.15,101.95 182.9,100.7
  region net GND: 209.05,83.15 209.8,83.9 208.15,85.55 207.4,84.8
  region net GND: 207.4,81.2 209.7,83.5 208.3,84.9 206,82.6
  rectangle net VCC+3.3V: 199.9,46.7 201.4,53.2
  rectangle net PGND: 78.75,33.975 81.375,35.075
  rectangle net PGND: 117.825,16.625 121.1,17.9
  rectangle net PGND: 104.55,17.1 107.575,18.15
  rectangle net PGND: 91.4,16.45 94.85,17.775
  pour cut-out: 59.49,3.748 59.294,2.414 59,1 56.5,1
  pour cut-out: 168.5,2.5 168.5,1 170,1
  pour cut-out: 55.5,22.5 55.519,22.519 59.294,22.519 59.294,20.706 59.5,20.5
  pour cut-out: 56.001,22.519 56.034,22.486 59.294,22.486 59.3,22.492 59.3,23.4 57.1,23.4 57,23.3
Bottom Layer:
  region net VCC+5V: 183.926,11.426 185.2,12.7 184.662,13.238 183.388,11.963
  region net VCC+5V: 184.459,10.029 185.2,10.77 184.053,11.917 183.312,11.176
  region net VCC+5V: 175.336,10.185 176.403,11.252 175.666,11.989 174.6,10.922
  region net VCC+5V: 174.574,10.084 175.311,10.82 174.168,11.963 173.431,11.227
  region net VCC+5V: 35.458,35.128 36.551,36.22 35.662,37.109 34.569,36.017
  region net VCC+5V: 34.925,35.103 35.458,35.636 34.392,36.703 33.858,36.17
  pour cut-out: 170,1 168.605,2.395
  pour cut-out: 168.409,2.917 169,1.5 169.5,0.5 168.5,1 168.267,1.233
  pour cut-out: 59.389,3.748 56.603,1 59.5,1

## Silkscreen, mask and mechanical layers (free items; w line width, h text height)
Top Overlay:
  circle w0.1: c219.6,103.2 r0.806
  circle w0.1: c229.622,16.6 r0.722
  circle w1: c226.6,14.4 r0.3
  circle w0.1: c226.588,14.4 r2.012
  circle w0.1: c215.425,95 r1.075
  circle w0.1: c179.197,111.455 r1.042
  circle w0.1: c179.008,117.45 r1.157
  lines w0.1: 226.8,15.1 228.044,16.344 228.4,16.7 228.8,16.7
  lines w1: 165.6,88.9 165.6,96.8 ; 168.5,89.1 168.5,96.6 ; 174.9,44.9 180.7,44.9 ; 175.1,41.9 180.9,41.9 ; 210,40.1 210,47.4 ; 213,40.4 213,47.3
  text "STATUS4" at 173.4,148.7 h1.5
  text "RI" at 123.977,148.412 h1.5
  text "STATUS1" at 133.8,148.4 h1.5
  text "STATUS2" at 146.8,148.4 h1.5
  text "STATUS3" at 159.8,148.4 h1.5
  text "STATUS" at 111.252,148.234 h1.5
  text "NET" at 102.26,148.107 h1.5
  text "V2" at 178.156,116.865 h1
  text "V1" at 178.283,111.557 h1 r315
  text "+" at 219,102.6 h1.5
  text "Li-Po" at 221.2,102.1 h2.5
  text "V0" at 214.9,95.8 h1 r270
  text "Source Security V2.1" at 43,68.6 h5
  text "e_lin Technology" at 57.5,63.7 h2.5
  text "20141006" at 90.9,63.6 h2
  text "12VDC_IN" at 209.8,23.6 h2
  text "+" at 229,16 h1.5
  text "1" at 87.122,9.322 h2
  text "2" at 92.304,9.322 h2
  text "3" at 97.206,9.322 h2
  text "4" at 101.752,9.322 h2
  text "5" at 107.036,9.322 h2
  text "6" at 112.243,9.322 h2
  text "7" at 117.45,9.322 h2
  text "8" at 122.479,9.322 h2
  text "9" at 127.61,9.322 h2
  text "10" at 132.004,9.322 h2
  text "11" at 137.262,9.322 h2
  text "12" at 142.138,9.322 h2
  text "13" at 147.041,9.322 h2
  text "14" at 152.349,9.322 h2
  text "15" at 157.277,9.322 h2
  text "16" at 162.357,9.322 h2
  text "SGND" at 66.878,9.017 h2
  text "K1" at 19.431,7.798 h1.5
  text "K2" at 28.931,7.798 h1.5
  text "K3" at 39.421,7.798 h1.5
  text "K4" at 49.505,7.722 h1.5
Mechanical 1:
  lines w0.254: -0.02,7.076 cw(c4.5,4.5) 7.15,0.022 227.858,0.022 ; -0.003,7.067 -0.003,147.765 ccw(c4.475,150.415) 6.99,154.969 ; 7.015,154.994 227.826,154.994 ccw(c230.475,150.516) 234.943,147.849 ; 227.848,0.005 cw(c230.425,4.525) 234.902,7.175 234.902,147.873

## Text inside footprints (layer, text, board x,y; h text height)
JTAG: Top Overlay "1" at 120.895,100.912 h1.2; Top Overlay "2" at 121.149,103.452 h1.2; Top Overlay "9" at 135.373,100.658 h1.2; Top Overlay "10" at 136.389,103.325 h1.2